# Altium PCB OUT_FET_PCB.PcbDoc
Units mil, origin at the board's own origin, x right, y up, seen from the top; angles counter-clockwise.
Board outline 3440 x 4740 mil, 2 copper layers (Top Layer, Bottom Layer); 90 components, 45 nets, 252 pads, 0 vias.
Unrouted connection lines stored in the file: 19.
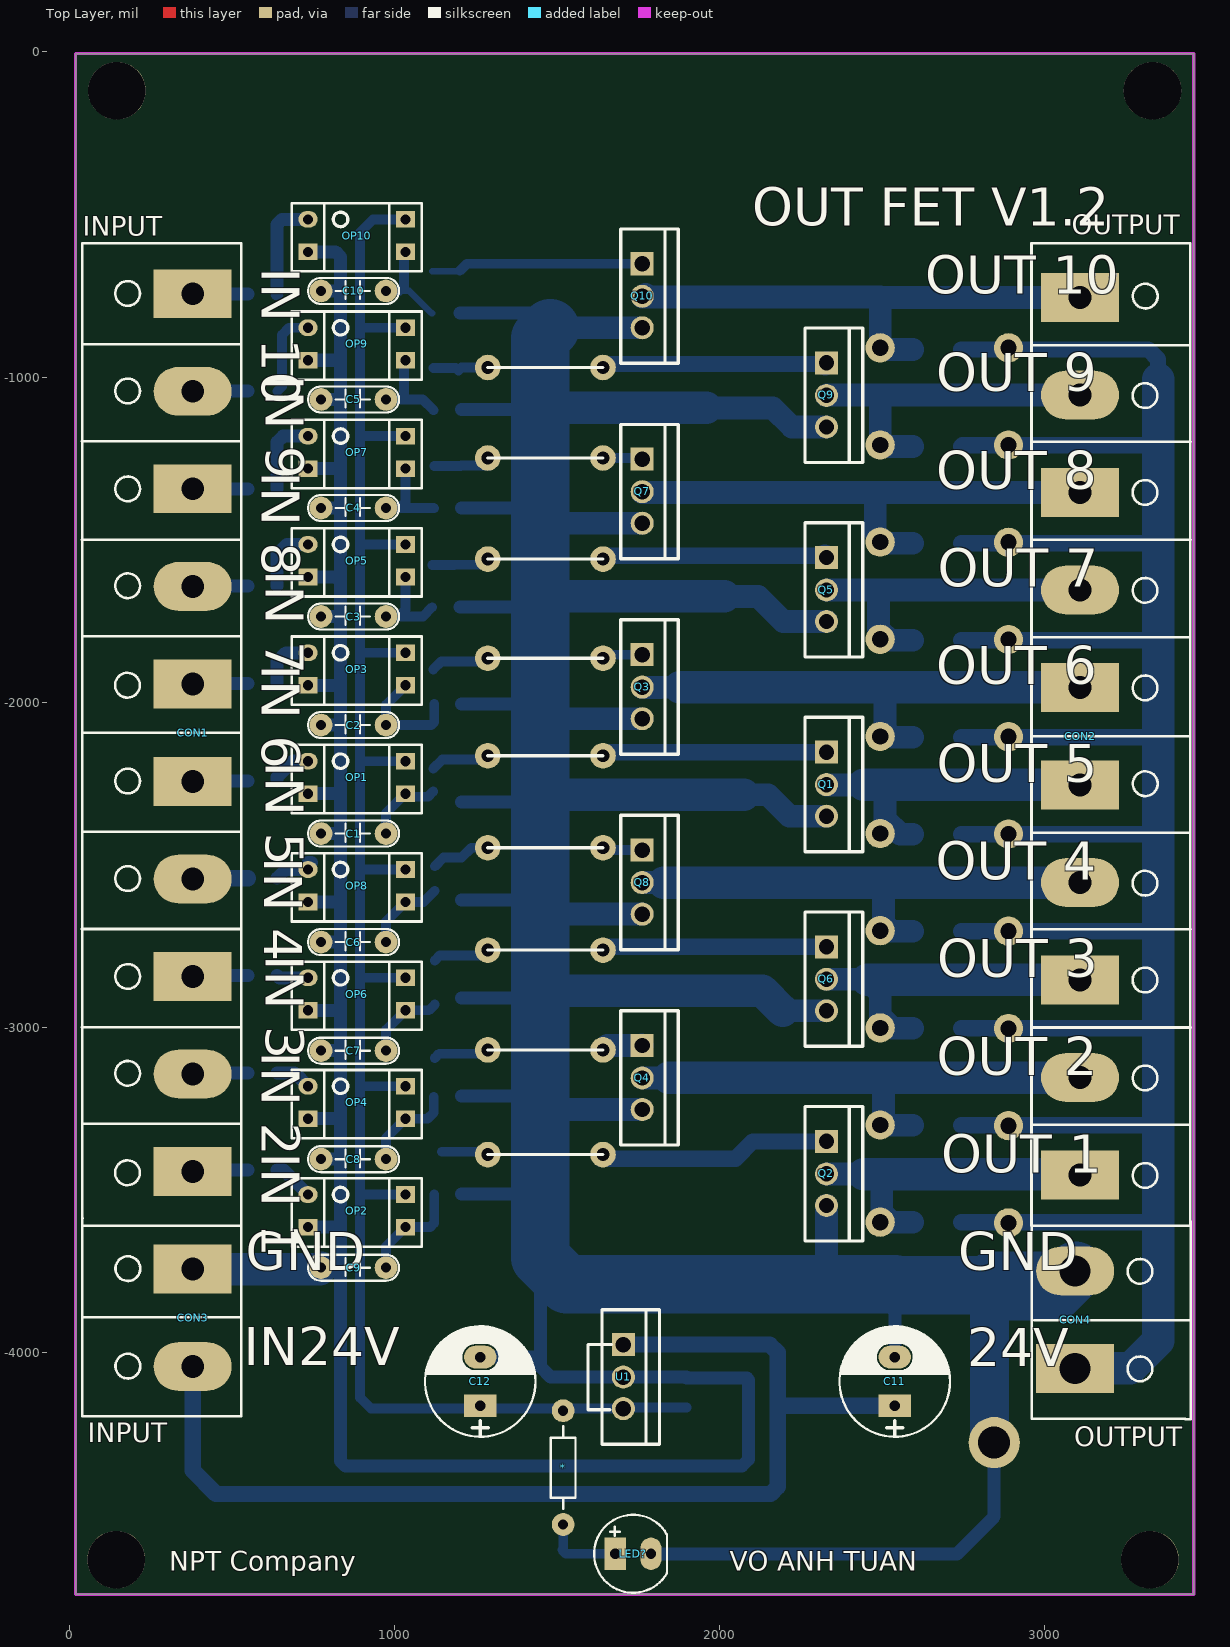
[diagram p0: Top Layer view]
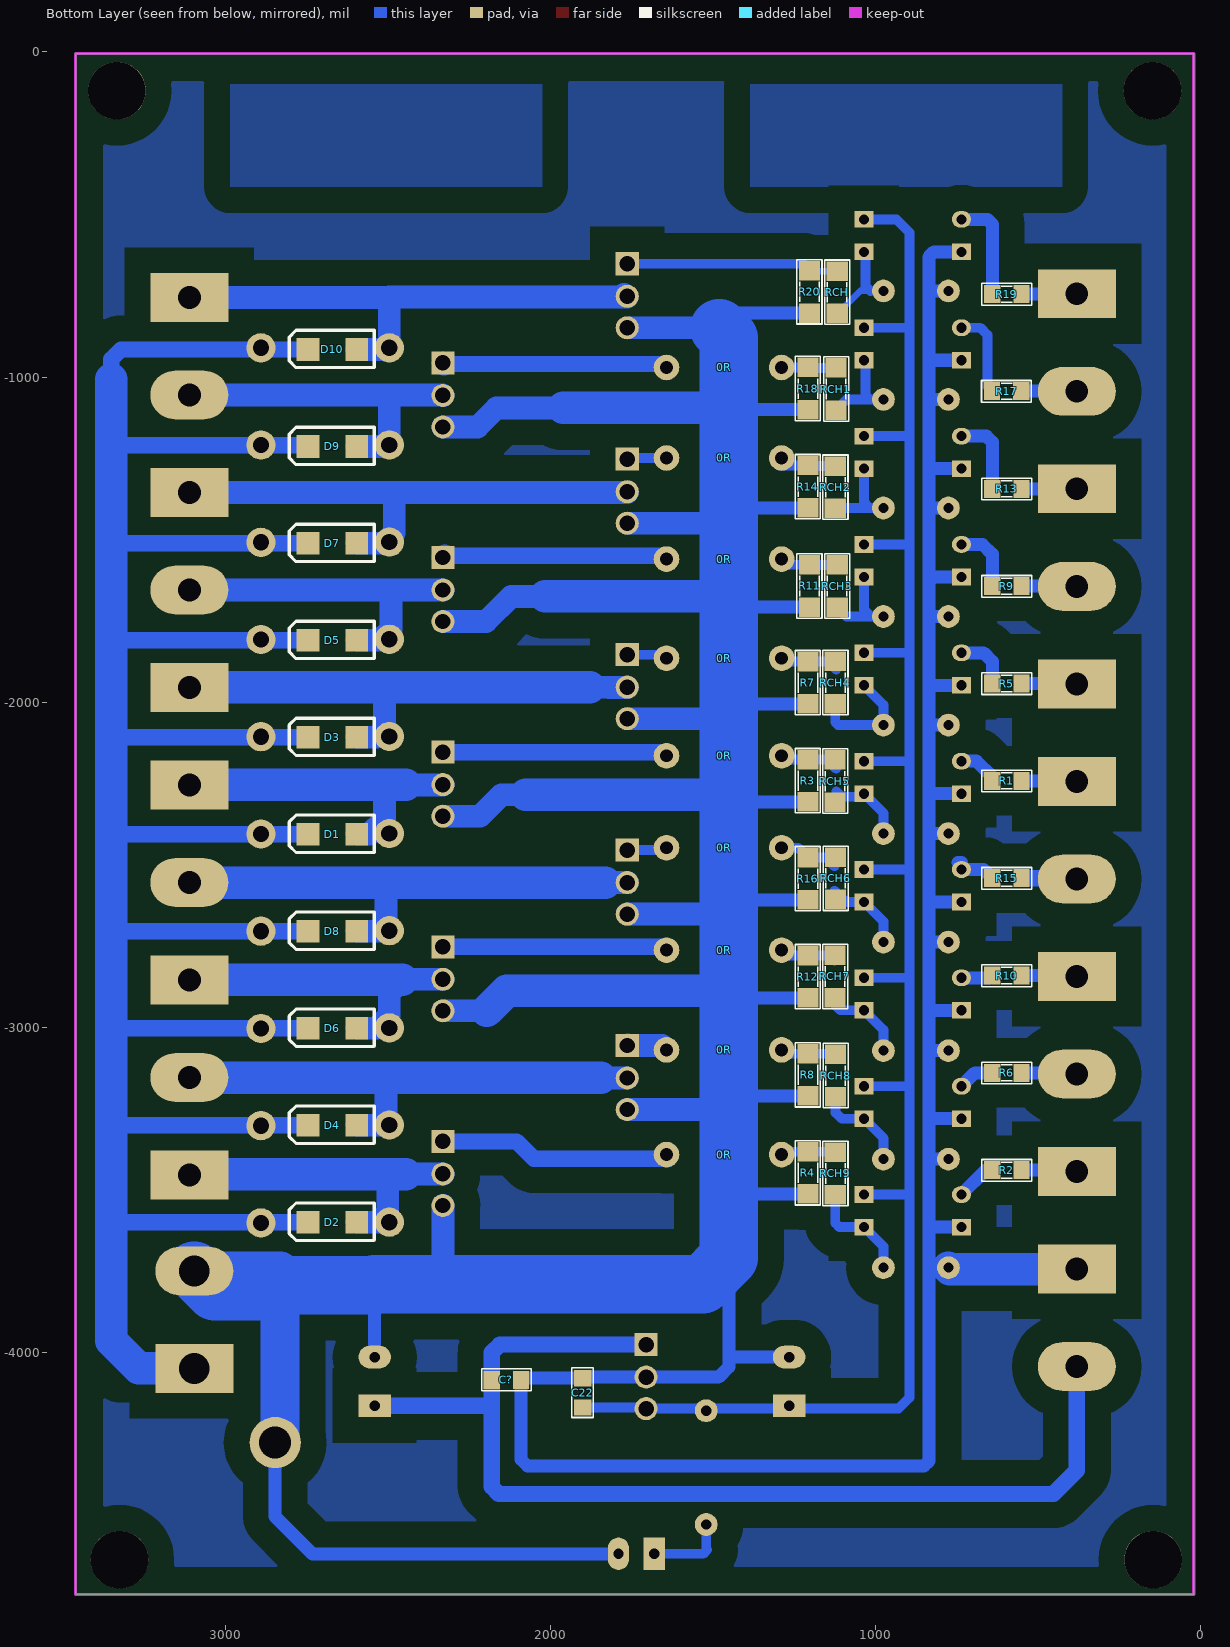
[diagram p1: Bottom Layer view, seen from below]
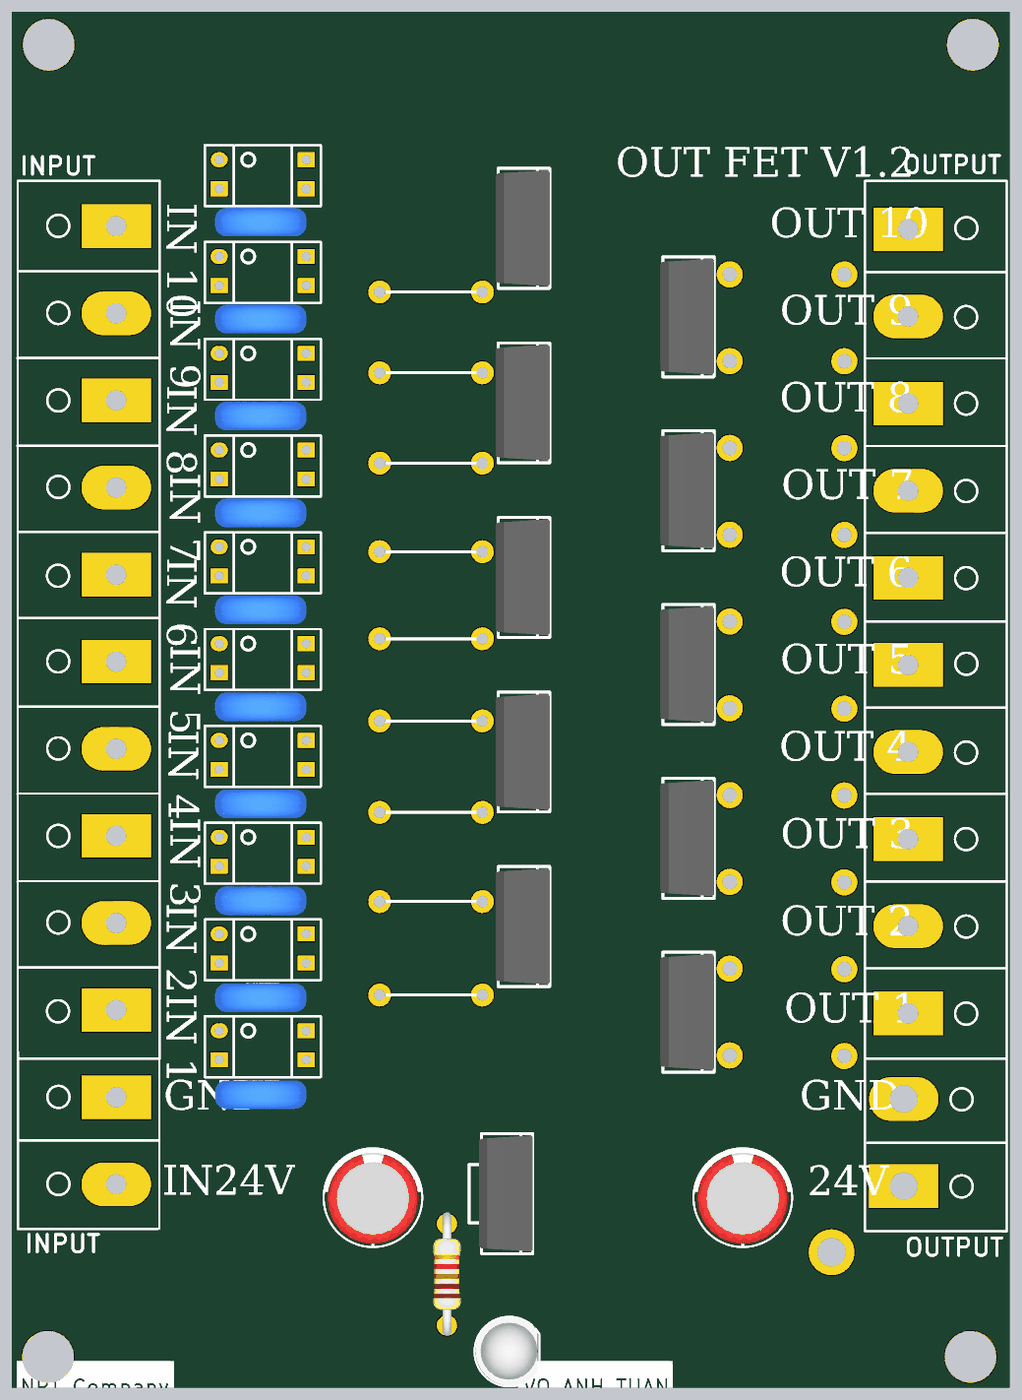
[diagram p2: 3D render of the assembled board from above, using the file's embedded part models]
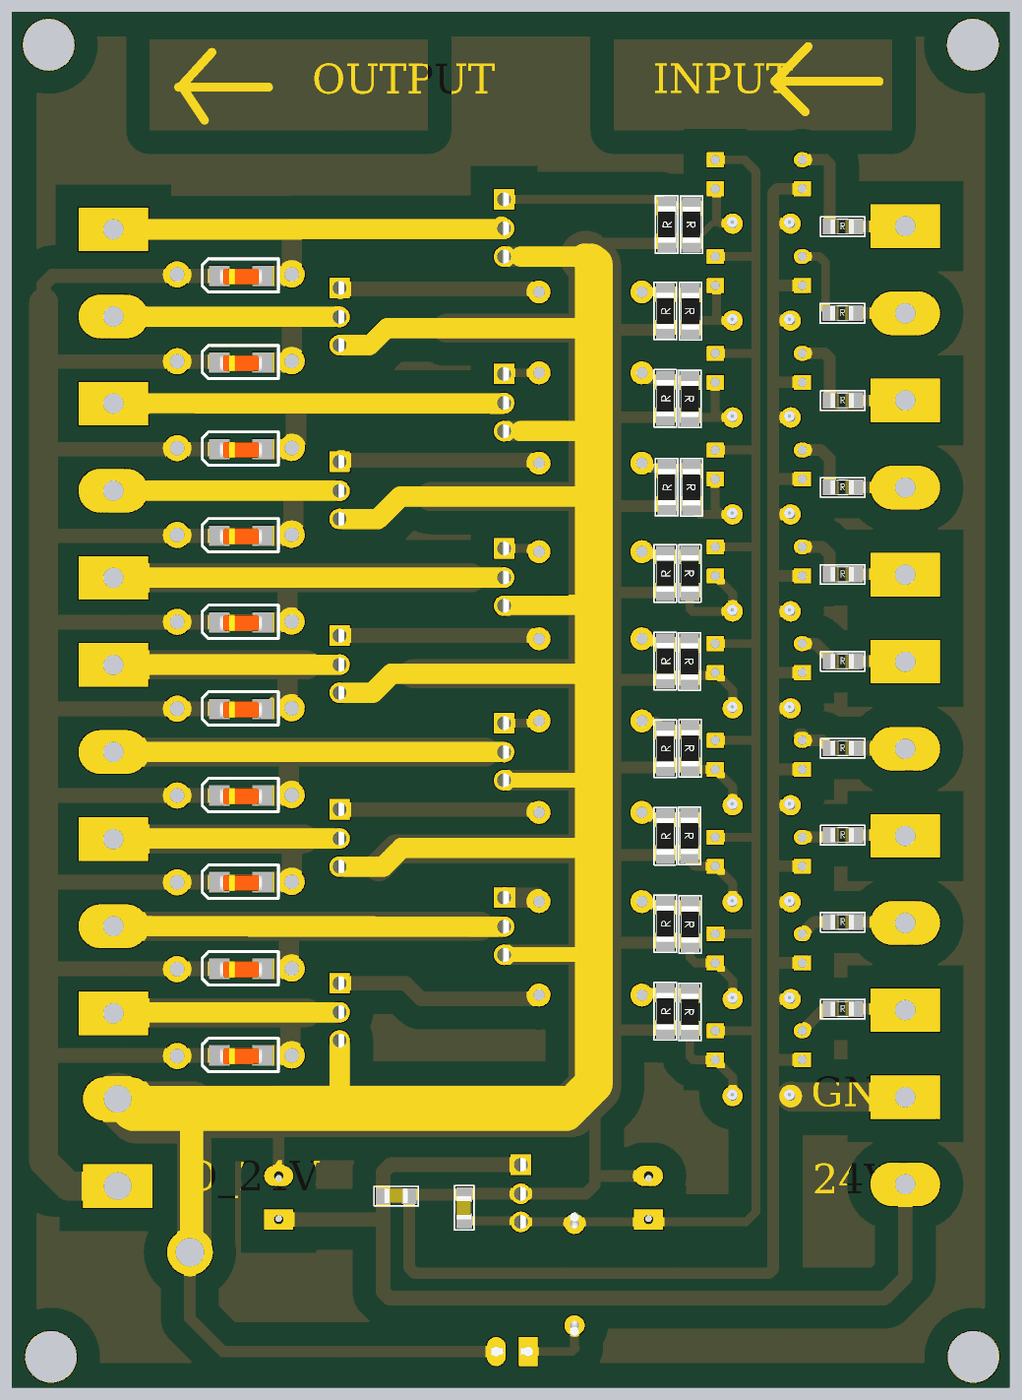
[diagram p3: 3D render of the assembled board from below, using the file's embedded part models]

## Layer stack, top to bottom
Top Solder: solder mask 0.4, Solder Resist, Dk 3.5
Top Layer: signal copper 1.4
Dielectric 1: dielectric 12.6, FR-4, Dk 4.8
Bottom Layer: signal copper 1.4
Bottom Solder: solder mask 0.4, Solder Resist, Dk 3.5

## Board outline
20,-4745 20,-5 3460,-5 3460,-4745

## Design rules (kind name [scope] priority, off if disabled: settings)
Clearance [All] p1: gap=10 ignorepadtopadclearanceinfootprint=FALSE except(0: Arc-Hole Track-Hole SMDPad-Hole THPad-Hole Via-Hole Fill-Hole Poly-Hole Region-Hole Text-Hole; 80: Arc-Poly Track-Poly SMDPad-Poly THPad-Poly Via-Poly Fill-Poly Poly-Poly)
PolygonConnect [All] p1: connectstyle=Relief reliefconductorwidth=10 reliefentries=4 polygonreliefangle="90 Angle" airgapwidth=10
RoomDefinition OUT_FET_SCH [InComponentClass('OUT_FET_SCH')] p1: confinementstyle=ConfineIn formatcopy=TRUE lockcomponents=FALSE outline -8591.47,-21464 -6591.47,-21464 -6591.47,-20464 -8591.47,-20464
RoutingVias [All] p1: holewidth=28 width=50 viastyle="Through Hole" minholewidth=28 minwidth=50 maxholewidth=28 maxwidth=50
SolderMaskExpansion [All] p1: expansion=4
Width [All] p1: maxlimit=200 minlimit=10 preferedwidth=50
30 further rules are at their usual default settings.

## Classes and differential pairs
component class OUT_FET_SCH: * C1 C2 C3 C4 C5 C6 C7 C8 C9 C10 C11 C12 C22 C? CON1 CON2 CON3 CON4 D1 D2 D3 D4 D5 D6 D7 D8 D9 D10 LED? OP1 OP2 OP3 OP4 OP5 OP6 OP7 OP8 OP9 OP10 Q1 Q2 Q3 Q4 Q5 Q6 Q7 Q8 Q9 Q10 R1 R2 R3 R4 R5 R6 R7 R8 R9 R10 R11 R12 R13 R14 R15 R16 R17 R18 R19 R20 U1

## Components (designator, comment, footprint, x,y, rotation, side; value= is the part's Value field where it differs from the comment)
0R "Comment" GIM 1288,-970.56 r0 bottom
0R "Comment" GIM 1288,-1249 r0 bottom
0R "Comment" GIM 1288,-1560 r0 bottom
0R "Comment" GIM 1288,-1865 r0 bottom
0R "Comment" GIM 1288,-2165 r0 bottom
0R "Comment" GIM 1288,-2448 r0 bottom
0R "Comment" GIM 1288,-2763 r0 bottom
0R "Comment" GIM 1288,-3070 r0 bottom
0R "Comment" GIM 1288,-3392 r0 bottom
* "1K" "TRO_VACH_ 1/4W" 1520,-4180 r270 top
C1 "104" TU_GOM(104-->105pF) 875,-2404.44 r0 top value=0.1uF
C2 "104" TU_GOM(104-->105pF) 875,-2070.56 r0 top value=0.1uF
C3 "104" TU_GOM(104-->105pF) 875,-1736.67 r0 top value=0.1uF
C4 "104" TU_GOM(104-->105pF) 875,-1402.78 r0 top value=0.1uF
C5 "104" TU_GOM(104-->105pF) 875,-1068.89 r0 top value=0.1uF
C6 "104" TU_GOM(104-->105pF) 875,-2738.33 r0 top value=0.1uF
C7 "104" TU_GOM(104-->105pF) 875,-3072.22 r0 top value=0.1uF
C8 "104" TU_GOM(104-->105pF) 875,-3406.11 r0 top value=0.1uF
C9 "104" TU_GOM(104-->105pF) 875,-3740 r0 top value=0.1uF
C10 "104" TU_GOM(104-->105pF) 875,-735 r0 top value=0.1uF
C11 "100uF/16V" "TU_HOA(100uF/35V - 470uF/16V)" 2540,-4090 r90 top value=100uF/35V/50V
C12 "100uF/16V" "TU_HOA(100uF/35V - 470uF/16V)" 1265,-4090 r90 top value=100uF/35V/50V
C22 "104" TU_SMD_0805 1900,-4125 r270 bottom
C? "104" TU_SMD_0805 2135,-4085 r0 bottom
CON1 "CON 10 KF762_MH" "CON 10 KF762" 380,-2094 r270 top
CON2 "CON 10 KF762_MH" "CON 10 KF762" 3110,-2105 r90 top
CON3 "CON 2 KF762_MH" "Con 2 KF762"#1 380,-3894 r270 top
CON4 "CON 2 KF762_MH" "Con 2 KF762"#2 3095,-3900 r90 top
D1 "Diode TVS P6KE30A 30V SMBJ30A" SOD80 2670,-2406.67 r180 bottom
D2 "Diode TVS P6KE30A 30V SMBJ30A" SOD80 2670,-3600 r180 bottom
D3 "Diode TVS P6KE30A 30V SMBJ30A" SOD80 2670,-2108.33 r180 bottom
D4 "Diode TVS P6KE30A 30V SMBJ30A" SOD80 2670,-3301.67 r180 bottom
D5 "Diode TVS P6KE30A 30V SMBJ30A" SOD80 2670,-1810 r180 bottom
D6 "Diode TVS P6KE30A 30V SMBJ30A" SOD80 2670,-3003.33 r180 bottom
D7 "Diode TVS P6KE30A 30V SMBJ30A" SOD80 2670,-1511.67 r180 bottom
D8 "Diode TVS P6KE30A 30V SMBJ30A" SOD80 2670,-2705 r180 bottom
D9 "Diode TVS P6KE30A 30V SMBJ30A" SOD80 2670,-1213.33 r180 bottom
D10 "Diode TVS P6KE30A 30V SMBJ30A" SOD80 2670,-915 r180 bottom
LED? "LED5" "LED 5mm DO" 1735,-4620 r0 top
OP1 "PC817" DIP4 735,-2181.67 r270 top
OP2 "PC817" DIP4 735,-3515 r270 top
OP3 "PC817" DIP4 735,-1848.33 r270 top
OP4 "PC817" DIP4 735,-3181.67 r270 top
OP5 "PC817" DIP4 735,-1515 r270 top
OP6 "PC817" DIP4 735,-2848.33 r270 top
OP7 "PC817" DIP4 735,-1181.67 r270 top
OP8 "PC817" DIP4 735,-2515 r270 top
OP9 "PC817" DIP4 735,-848.33 r270 top
OP10 "PC817" DIP4 735,-515 r270 top
Q1 "FDD 8870" TO220F 2330,-2252.5 r270 top
Q2 "FDD 8870" TO220F 2330,-3450 r270 top
Q3 "FDD 8870" TO220F 1763,-1952.5 r270 top
Q4 "FDD 8870" TO220F 1763,-3155 r270 top
Q5 "FDD 8870" TO220F 2330,-1653.75 r270 top
Q6 "FDD 8870" TO220F 2330,-2851.25 r270 top
Q7 "FDD 8870" TO220F 1763,-1351.25 r270 top
Q8 "FDD 8870" TO220F 1763,-2553.75 r270 top
Q9 "FDD 8870" TO220F 2330,-1055 r270 top
Q10 "FDD 8870" TO220F 1763,-750 r270 top
R1 "2K2" "Tro SMD 0805" 595,-2242.22 r180 bottom
R2 "2K2" "Tro SMD 0805" 595,-3440 r180 bottom
R3 "10K" TRO_SMD_1206 1210,-2243.78 r90 bottom
R4 "10K" TRO_SMD_1206 1210,-3450 r90 bottom
R5 "2K2" "Tro SMD 0805" 595,-1942.78 r180 bottom
R6 "2K2" "Tro SMD 0805" 595,-3140.56 r180 bottom
R7 "10K" TRO_SMD_1206 1210,-1942.22 r90 bottom
R8 "10K" TRO_SMD_1206 1210,-3148.44 r90 bottom
R9 "2K2" "Tro SMD 0805" 595,-1643.33 r180 bottom
R10 "2K2" "Tro SMD 0805" 595,-2841.11 r180 bottom
R11 "10K" TRO_SMD_1206 1205,-1644.67 r90 bottom
R12 "10K" TRO_SMD_1206 1210,-2846.89 r90 bottom
R13 "2K2" "Tro SMD 0805" 595,-1343.89 r180 bottom
R14 "10K" TRO_SMD_1206 1210,-1339.11 r90 bottom
R15 "2K2" "Tro SMD 0805" 595,-2541.67 r180 bottom
R16 "10K" TRO_SMD_1206 1210,-2545.33 r90 bottom
R17 "2K2" "Tro SMD 0805" 596,-1043.44 r180 bottom
R18 "10K" TRO_SMD_1206 1210,-1037.56 r90 bottom
R19 "2K2" "Tro SMD 0805" 595,-745 r180 bottom
R20 "10K" TRO_SMD_1206 1205,-740 r90 bottom
RCH "Comment" TRO_SMD_1206 1114,-737 r270 bottom
RCH1 "Comment" TRO_SMD_1206 1118,-1035 r270 bottom
RCH2 "Comment" TRO_SMD_1206 1120,-1337 r270 bottom
RCH3 "Comment" TRO_SMD_1206 1114,-1641 r270 bottom
RCH4 "Comment" TRO_SMD_1206 1120,-1938 r270 bottom
RCH5 "Comment" TRO_SMD_1206 1121,-2241 r270 bottom
RCH6 "Comment" TRO_SMD_1206 1119,-2540 r270 bottom
RCH7 "Comment" TRO_SMD_1206 1121,-2842 r270 bottom
RCH8 "Comment" TRO_SMD_1206 1119,-3147 r270 bottom
RCH9 "Comment" TRO_SMD_1206 1120,-3448 r270 bottom
U1 "78M12 TO252_MH" TO220F 1705,-4075 r270 top

## Footprints (in the part's own frame and the unit in brackets; to place one, negate y for a bottom-side part, rotate by r counter-clockwise, add the part's x,y. Pads: shape width x height; smd on the part's side, far side on the other; paste and mask are expansions set on the pad)
"Con 2 KF762"#1 [mil]
  rect 150x240 hole 70: 1(-150,0)
  oval 150x240 hole 70: 2(150,0)
  silkscreen extent -306,-339 304,149
"Con 2 KF762"#2 [mil]
  rect 150x240 hole 95: 1(-150,0)
  oval 150x240 hole 95: 2(150,0)
  silkscreen extent -306,-355 303,134
"CON 10 KF762" [mil]
  rect 150x240 hole 70: 1(-1350,0) 3(-750,0) 5(-150,0) 6(150,0) 8(750,0) 10(1350,0)
  oval 150x240 hole 70: 2(-1050,0) 4(-450,0) 7(450,0) 9(1050,0)
  silkscreen extent -1506,-341 1517,149
DIP4 [mm] "W.300/L.400"
  oval 1.3x1.5 hole 0.8: 1(0,0)
  rect 1.3x1.5 hole 0.8: 2(2.54,0) 3(2.54,7.62) 4(0,7.62)
  silkscreen extent -1.27,-1.27 4.06,8.89, body extent -1.27,-1.27 4.06,8.89, height 5
GIM [mm]
  round 2 hole 1: 1(0,0) 1(9,0)
"LED 5mm DO" [mil] "LED 2 PIN, 5 ly , Only colour, pin to pin 110mil"
  rect 65x100 hole 32: 1(-55,0)
  oval 65x100 hole 32: 2(55,0)
  silkscreen extent -120,-120 104,120, body extent -116,-117 98,120, height 339
SOD80 [mil]
  rect 70x70 smd: 1(74.8,0) 2(-74.8,0)
  silkscreen extent -133,-56 129,59, body extent -73,-34 73,29, height 63
TO220F [mm]
  rect 1.8x1.8 hole 1.2: 1(-2.502,0)
  round 1.8 hole 1.2: 2(0.038,0) 3(2.502,0)
  silkscreen extent -5.22,-1.68 5.28,2.82, body extent -5.06,-1.88 5.08,2.82, height 19.37
"Tro SMD 0805" [mil]
  rect 50x55 smd: 1(-45,0) 2(45,0)
  silkscreen extent -77,-34 76,33, body extent -62,-28 56,27, height 21
TRO_SMD_1206 [mil]
  rect 60x65 smd: 1(-63,-3) 2(67,-3)
  silkscreen extent -97,-41 101,36, body extent -81,-38 85,33, height 25
"TRO_VACH_ 1/4W" [mil] "R 1/4W, 2 Pin, 350mil"
  round 70 hole 31: 1(0,0) 2(350,0)
  silkscreen extent 48,-38 302,38, body extent -40,-47 386,47, height 111
TU_GOM(104-->105pF) [mil]
  round 70 hole 31: 1(-100,0) 2(100,0)
  silkscreen extent -140,-40 140,40, body extent -154,-44 160,55, height 407
"TU_HOA(100uF/35V - 470uF/16V)" [mil]
  rect 70x100 hole 32: 1(-75,0)
  oval 70x100 hole 32: 2(75,0)
  silkscreen extent -170,-170 170,170, body extent -160,-157 155,157, height 446
TU_SMD_0805 [mil]
  rect 50x55 smd: 1(-45,0) 2(45,0)
  silkscreen extent -77,-34 76,33, body extent -40,-27 40,23, height 24

## Part data
*: library part TRO_VACH_1/4W_MH
C1 C2 C3 C4 C5 C6 C7 C8 C9 C10: library part "TU_GOM(104 => 105pF)_MH"
C11 C12: library part TU_HOA_100uF_50V_MH, "TU_HOA_100uF_50V", Description 1="1000uF/6,3V - 470uF/16V - 330uF - 25V", Description 2="220uF/35V - 100uF/50V - 63V - 4,7uF/200V", Description 3="22uF => 33uF100V - 3,3uF => 4,7uF/250V", Description 4="2,2uF =>3,3uF/350 - 2,2uF/400V - 1uF/450V"
C22 C?: library part TU_SMD_0805_MH
CON1 CON2: "CON 10 KF762 - 10P 7.62mm"
CON3 CON4: "CON 2 KF762 - 2P 7.62mm"
D1 D2 D3 D4 D5 D6 D7 D8 D9 D10: library part "Diode 1N4148 SOD80 450mA 100V ( LL34 1N4148 SMD)_MH", "Diode 1N4148 SOD80 450mA 100V ( LL34 1N4148 SMD)"
LED?: library part "LED 5mm_MH", "LED 5mm"
OP1 OP2 OP3 OP4 OP5 OP6 OP7 OP8 OP9 OP10: library part "PC817/EL817 5V 5mA SMD_MH", "PC817/EL817 5V 5mA SMD_MH"
R1 R2 R3 R4 R5 R6 R7 R8 R9 R10 R11 R12 R13 R14 R15 R16 R17 R18 R19 R20: library part TRO_SMD_1206_MH

## Free pads (board coordinates)
  round 177.17 hole 177.17: 22(147,-119) 23(3333,-119) 24(3325,-4638) 25(145,-4638)
  round 157.48 hole 98.43: 29(2846,-4278)
  round 90 hole 50: 30(2495,-910) 31(2495,-1208.89) 32(2495,-1507.78) 33(2495,-1806.67) 34(2495,-2105.56) 35(2495,-2404.44) 36(2495,-2703.33) 37(2495,-3002.22) 38(2495,-3301.11) 39(2495,-3600) 40(2890,-3602.11) 41(2890,-3303) 42(2890,-3003.89) 43(2890,-2704.78) 44(2890,-2405.67) 45(2890,-2106.56) 46(2890,-1807.44) 47(2890,-1508.33) 48(2890,-1209.22) 49(2890,-910.11)

## Nets (pads, with @x,y where several pads share a name; then routed paths per layer and width w, separated by ;. In a path a pad name is that pad's centre, name@x,y a point inside that pad or via, vN(x,y) a via of type N, cw(c..) or ccw(c..) an arc to the next point about the centre after c; other vN are vias at no path point)
12V: *.1 C12.1 C22.2 OP1.4 OP2.4 OP3.4 OP4.4 OP5.4 OP6.4 OP7.4 OP8.4 OP9.4 OP10.4 U1.3 | length 6041.9
  Bottom Layer w30: OP2.4 900,-3515 895,-3510 ; OP4.4 896.67,-3181.67 895,-3180 ; OP6.4 898.33,-2848.33 895,-2845 ; OP8.4 905,-2515 895,-2525 ; OP1.4 898.33,-2181.67 895,-2185 ; OP3.4 901.67,-1848.33 895,-1855 ; OP5.4 900,-1515 895,-1510 ; OP7.4 901.67,-1181.67 895,-1175 ; OP9.4 901.67,-848.33 895,-855 ; OP10.4 935,-515 895,-555 895,-855 ; C22.2 1708.5,-4170 U1.3 928.5,-4173.5 895,-4140 895,-3510 ; 895,-3510 895,-3180 ; 895,-3180 895,-2845 ; 895,-2845 895,-2525 ; 895,-2525 895,-2185 ; 895,-2185 895,-1855 ; 895,-1855 895,-1510 ; 895,-1510 895,-1175 ; 895,-1175 895,-855
24V: C11.1 C?.2 CON3.2 U1.1 | length 3419.6
  Bottom Layer w50: CON3.2 380,-4364 452,-4436 2158,-4436 2180,-4414 2180,-4159 ; U1.1 2155.5,-3976.5 2180,-4001 C?.2 2180,-4159 ; C11.1 2186,-4165 2180,-4159
GND: C1.1 C2.1 C3.1 C4.1 C5.1 C6.1 C7.1 C8.1 C9.1 C10.1 C11.2 C12.2 C22.1 C?.1 CON3.1 CON4.2 LED?.2 OP1.2 OP2.2 OP3.2 OP4.2 OP5.2 OP6.2 OP7.2 OP8.2 OP9.2 OP10.2 pad.29 Q1.3 Q2.3 Q3.3 Q4.3 Q5.3 Q6.3 Q7.3 Q8.3 Q9.3 Q10.3 R3.1 R4.1 R7.1 R8.1 R11.1 R12.1 R14.1 R16.1 R18.1 R20.1 U1.2 | length 23242
  Bottom Layer w40: OP2.2 830,-3615 835,-3610 ; OP4.2 831.67,-3281.67 835,-3285 ; OP6.2 833.33,-2948.33 835,-2950 ; OP8.2 825,-2615 835,-2625 ; OP1.2 831.67,-2281.67 835,-2285 ; OP3.2 833.33,-1948.33 835,-1950 ; OP5.2 820,-1615 835,-1630 ; OP7.2 826.67,-1281.67 835,-1290 ; OP9.2 831.67,-948.33 835,-945 ; OP10.2 820,-615 835,-630 835,-740 ; C9.1 835,-3740 ; C8.1 833.89,-3406.11 835,-3405 ; C7.1 832.22,-3072.22 835,-3075 ; C6.1 833.33,-2738.33 835,-2740 ; C1.1 834.44,-2404.44 835,-2405 ; C2.1 834.44,-2070.56 835,-2070 ; C3.1 826.67,-1736.67 835,-1745 ; C4.1 832.78,-1402.78 835,-1405 ; C5.1 833.89,-1068.89 835,-1070 ; C10.1 830,-735 835,-740 ; R11.1 1402.33,-1707.67 ; R20.1 1436,-803 1481.5,-848.5 ; R4.1 1447,-3513 1450,-3510 ; R8.1 1406.44,-3211.44 1450,-3255 ; R12.1 1405.11,-2909.89 1450,-2865 ; R16.1 1408.33,-2608.33 1450,-2650 ; R3.1 1428.22,-2306.78 1450,-2285 ; R7.1 1390.22,-2005.22 1450,-2065 ; R14.1 1392.11,-1402.11 1450,-1460 ; R18.1 1444.44,-1100.56 1450,-1095 ; C12.2 1450,-4015 ; 1450,-3710 1450,-4015 ; LED?.2 2732,-4620 2846,-4506 pad.29 ; C22.1 2085,-4080 C?.1 2090,-4330 2070,-4350 850,-4350 835,-4335 835,-3740 ; C22.1@1900,-4076.5 U1.2 1481.5,-4076.5 1450,-4045 1450,-4015 ; C11.2 2540,-3794 2540,-3791 ; 835,-3740 835,-3610 ; 835,-3610 835,-3405 ; 835,-3405 835,-3285 ; 835,-3285 835,-3075 ; 835,-3075 835,-2950 ; 835,-2950 835,-2740 ; 835,-2740 835,-2625 ; 835,-2625 835,-2405 ; 835,-2405 835,-2285 ; 835,-2285 835,-2070 ; 835,-2070 835,-1950 ; 835,-1950 835,-1745 ; 835,-1745 835,-1630 ; 835,-1630 835,-1405 ; 835,-1405 835,-1290 ; 835,-1290 835,-1070 ; 835,-1070 835,-945 ; 835,-945 835,-740
  Bottom Layer w70: 1450,-3255 1451.5,-3253.5 Q4.3 ; 1450,-2650 1452.25,-2652.25 Q8.3 ; 1450,-2065 1464,-2051 Q3.3 ; 1450,-1460 1460.25,-1449.75 Q7.3 ; 1480,-850 1481.5,-848.5 Q10.3@1754,-848.5 ; 1960,-1095 2165,-1095 2223.5,-1153.5 Q9.3 ; 2015,-1675 2120,-1675 2197.25,-1752.25 Q5.3 ; 2075,-2285 2150,-2285 2216,-2351 Q1.3 ; 2195,-2950 2195.25,-2949.75 Q6.3 ; 2325,-3750 2330,-3745 Q2.3
  Bottom Layer w100: CON3.1 771,-3744 C9.1 ; 1450,-2888 2133,-2888 2195,-2950 ; 1450,-2285 2075,-2285 ; 1450,-1675 2015,-1675 ; 1450,-1095 1960,-1095
  Bottom Layer w120: 2831,-3794 2831,-3813 2831,-4253 pad.29 ; 2831,-3750 CON4.2
  Bottom Layer w180: 1480,-850 1450,-880 1450,-1095 1450,-1460 1450,-1675 1450,-2065 1450,-2285 1450,-2650 1450,-2865 1450,-2888 1450,-3255 1450,-3510 1450,-3710 1531,-3791 2540,-3791 ; 2540,-3794 2831,-3794 ; 2831,-3813 3032,-3813 CON4.2
IN1: CON1.10 R2.2 | length 171.7
  Bottom Layer w40: CON1.10 384,-3440 R2.2
IN2: CON1.9 R6.2 | length 171.4
  Bottom Layer w40: CON1.9 383.44,-3140.56 R6.2
IN3: CON1.8 R10.2 | length 171.2
  Bottom Layer w40: CON1.8 382.89,-2841.11 R10.2
IN4: CON1.7 R15.2 | length 171
  Bottom Layer w50: CON1.7 382.33,-2541.67 R15.2
IN5: CON1.6 R1.2 | length 170.7
  Bottom Layer w40: CON1.6 381.78,-2242.22 R1.2
IN6: CON1.5 R5.2 | length 170.5
  Bottom Layer w40: CON1.5 381.22,-1942.78 R5.2
IN7: CON1.4 R9.2 | length 170.3
  Bottom Layer w40: CON1.4 380.67,-1643.33 R9.2
IN8: CON1.3 R13.2 | length 170
  Bottom Layer w40: CON1.3 380.11,-1343.89 R13.2
IN9: CON1.2 R17.2 | length 171.2
  Bottom Layer w40: CON1.2 380.56,-1043.44 R17.2
IN10: CON1.1 R19.2 | length 170.4
  Bottom Layer w40: CON1.1 381,-745 R19.2
Net*_2: *.2 LED?.1 | length 261.4
  Bottom Layer w30: *.2@1530,-4520 *.2 1520,-4605 1517,-4608 1529,-4620 LED?.1
NetC1_2: 0R.1@1288,-2165 0R.1@1642.33,-2165 C1.2 OP1.3 Q1.1 R3.2 RCH5.1 RCH5.2 | length 1111.9
  Bottom Layer w30: C1.2 975,-2341.67 OP1.3 ; OP1.3@1045,-2291.11 1103.89,-2291.11 1120,-2275 ; RCH5.1@1120,-2205 1148.22,-2176.78 R3.2 0R.1@1303.22,-2176.78
  Bottom Layer w50: 0R.1@1642.33,-2154 Q1.1
NetC2_2: 0R.1@1288,-1865 0R.1@1642.33,-1865 C2.2 OP3.3 Q3.1 R7.2 RCH4.1 RCH4.2 | length 655.3
  Bottom Layer w30: OP3.3 975,-2008.33 C2.2 1114.44,-2070.56 1123,-2062 RCH4.2 ; RCH4.1@1120,-1900 1144.78,-1875.22 R7.2 0R.1@1299.78,-1875.22 ; 0R.1@1653.33,-1854 Q3.1
NetC3_2: 0R.1@1288,-1560 0R.1@1642.33,-1560 C3.2 OP5.3 Q5.1 R11.2 RCH3.1 RCH3.2 | length 1149.8
  Bottom Layer w30: C3.2 1013.33,-1736.67 ; OP5.3 1035,-1715 1013.33,-1736.67 ; RCH3.2 1088.33,-1736.67 1013.33,-1736.67 ; RCH3.1 1184.67,-1578 1185,-1577.67 R11.2 0R.1@1292.33,-1577.67
  Bottom Layer w50: 0R.1@1642.33,-1550 Q5.1@2324.75,-1550
  Bottom Layer w70: Q5.1@2324.75,-1550 Q5.1
NetC4_2: 0R.1@1288,-1249 0R.1@1642.33,-1249 C4.2 OP7.3 Q7.1 R14.2 RCH2.1 RCH2.2 | length 564.6
  Bottom Layer w30: C4.2 1017.22,-1402.78 ; OP7.3 1035,-1385 1017.22,-1402.78 ; RCH2.2 1121.78,-1402.78 1017.22,-1402.78 ; RCH2.1 1205.11,-1274 R14.2 0R.1@1292.89,-1272.11 ; 0R.1@1642.33,-1249 Q7.1@1759.25,-1249
NetC5_2: 0R.1@1288,-970.56 0R.1@1642.33,-970.56 C5.2 OP9.3 Q9.1 R18.2 RCH1.1 RCH1.2 | length 1152.9
  Bottom Layer w30: C5.2 1016.11,-1068.89 ; OP9.3 1030,-953.33 1030,-1055 1016.11,-1068.89 ; RCH1.2 1087.89,-1068.89 1016.11,-1068.89 ; RCH1.1 1189.56,-972 1197.56,-980 R18.2 1288,-970.56 0R.1@1289.44,-970.56
  Bottom Layer w50: 0R.1@1642.33,-960 Q9.1@2326.5,-960
  Bottom Layer w70: Q9.1@2326.5,-960 Q9.1
NetC6_2: 0R.1@1288,-2448 0R.1@1642.33,-2448 C6.2 OP8.3 Q8.1 R16.2 RCH6.1 RCH6.2 | length 552.7
  Bottom Layer w30: C6.2 975,-2675 OP8.3 1090,-2615 RCH6.2@1125,-2580 ; RCH6.1@1125,-2505 1151.67,-2478.33 R16.2 1237.33,-2448 0R.1@1288,-2448 ; 0R.1@1649.58,-2455.25 Q8.1
NetC7_2: 0R.1@1288,-2763 0R.1@1642.33,-2763 C7.2 OP6.3 Q6.1 R12.2 RCH7.1 RCH7.2 | length 1115.2
  Bottom Layer w30: C7.2 975,-3008.33 OP6.3 1106.67,-2948.33 RCH7.2@1125,-2930 ; RCH7.1@1125,-2795 1140.11,-2779.89 R12.2 0R.1@1299.89,-2779.89
  Bottom Layer w50: 0R.1@1642.33,-2752.75 Q6.1
NetC8_2: 0R.1@1288,-3070 0R.1@1642.33,-3070 C8.2 OP4.3 Q4.1 R8.2 RCH8.1 RCH8.2 | length 579.4
  Bottom Layer w30: C8.2 975,-3341.67 OP4.3 1103.33,-3281.67 1122,-3263 RCH8.2 ; RCH8.1@1125,-3095 1138.56,-3081.44 R8.2 0R.1@1296.44,-3081.44
  Bottom Layer w70: 0R.1@1655.83,-3056.5 Q4.1 Q4.1@1761.5,-3055
NetC9_2: 0R.1@1288,-3392 0R.1@1642.33,-3392 C9.2 OP2.3 Q2.1 R4.2 RCH9.1 RCH9.2 | length 1193
  Bottom Layer w30: C9.2 975,-3675 OP2.3 1111,-3615 1123,-3603 RCH9.2 ; RCH9.1@1147,-3383 R4.2 0R.1@1293,-3383
  Bottom Layer w50: 0R.1@1636,-3405 2050,-3405 2103.5,-3351.5 Q2.1
NetC10_2: C10.2 OP10.3 Q10.1 R20.2 RCH.1 RCH.2 | length 954.2
  Bottom Layer w20: C10.2 1015,-735 1046,-735 1115,-804 RCH.2 ; RCH.1 1201,-674 R20.2
  Bottom Layer w30: 1015,-735 1030,-720 1030,-620 OP10.3 ; R20.2 1223.5,-651.5 Q10.1
NetOP1_1: OP1.1 R1.1 | length 127.2
  Bottom Layer w40: R1.1 640,-2230 688.33,-2181.67 OP1.1
NetOP2_1: OP2.1 R2.1 | length 126.1
  Bottom Layer w40: R2.1 660,-3440 OP2.1
NetOP3_1: OP3.1 R5.1 | length 173.8
  Bottom Layer w40: R5.1 640,-1875 666.67,-1848.33 OP3.1
NetOP4_1: OP4.1 R6.1 | length 112
  Bottom Layer w40: R6.1 693.89,-3140.56 OP4.1
NetOP5_1: OP5.1 R9.1 | length 205.8
  Bottom Layer w40: R9.1 640,-1545 670,-1515 OP5.1
NetOP6_1: OP6.1 R10.1 | length 98
  Bottom Layer w40: R10.1 647.22,-2848.33 OP6.1
NetOP7_1: OP7.1 R13.1 | length 246.5
  Bottom Layer w40: R13.1 640,-1200 658.33,-1181.67 OP7.1
NetOP8_1: OP8.1 R15.1 | length 116
  Bottom Layer w40: R15.1 666.67,-2515 OP8.1 ; OP8.1@735,-2493.33 OP8.1@745,-2493.33
NetOP9_1: OP9.1 R17.1 | length 268.2
  Bottom Layer w30: R17.1 655,-1029.44 655,-870 676.67,-848.33 OP9.1
NetOP10_1: OP10.1 R19.1 | length 316.2
  Bottom Layer w40: R19.1 640,-530 655,-515 OP10.1
OUT1: CON2.1 D2.1 pad.39 Q2.2 | length 1007.1
  Bottom Layer w70: Q2.2 2443.43,-3451.5 2445,-3453.07 ; 2500,-3453.07 2500,-3570 2530,-3600 D2.1
  Bottom Layer w100: 2445,-3453.07 2500,-3453.07 3110,-3453.07 CON2.1
OUT2: CON2.2 D4.1 pad.38 Q4.2 | length 1629.8
  Bottom Layer w70: Q4.2 1901.5,-3156.5 1903,-3155 ; 2505,-3155 2505,-3280 2526.67,-3301.67 D4.1
  Bottom Layer w100: 1845,-3155 2505,-3155 CON2.2
OUT3: CON2.3 D6.1 pad.37 Q6.2 | length 1024.7
  Bottom Layer w70: Q6.2 2453.43,-2852.75 2455,-2854.32 2495,-2894.32 2495,-2965 2533.33,-3003.33 D6.1
  Bottom Layer w100: 2455,-2854.32 3110,-2854.32 CON2.3
OUT4: CON2.4 D8.1 pad.36 Q8.2 | length 1630.7
  Bottom Layer w70: Q8.2 1887.75,-2555.25 1888,-2555 ; 2505,-2555 2505,-2680 2530,-2705 D8.1
  Bottom Layer w100: 1830,-2555 2505,-2555 CON2.4
OUT5: CON2.5 D1.1 pad.35 Q1.2 | length 989.9
  Bottom Layer w70: Q1.2 2331,-2255 2445,-2255 ; 2510,-2255 2510,-2360 2556.67,-2406.67 D1.1
  Bottom Layer w100: 2445,-2255 2510,-2255 CON2.5
OUT6: CON2.6 D3.1 pad.34 Q3.2 | length 1627.7
  Bottom Layer w70: 1818,-1955 1764,-1955 Q3.2 1877,-1954 1878,-1955 ; 2510,-1955 2510,-2085 2533.33,-2108.33 D3.1
  Bottom Layer w100: 1878,-1955 2510,-1955 CON2.6
OUT7: CON2.7 D5.1 pad.33 Q5.2 | length 1019.8
  Bottom Layer w70: Q5.2 2330.25,-1655 2490,-1655 ; D5.1 2525,-1810 2490,-1775 2490,-1655 ; CON2.7 2490,-1655
OUT8: CON2.8 D7.1 pad.32 Q7.2 | length 1600.3
  Bottom Layer w70: Q7.2@1763,-1355 2480,-1355 ; D7.1 2511.67,-1511.67 2480,-1480 2480,-1355 ; CON2.8 2480,-1355
OUT9: CON2.9 D9.1 pad.31 Q9.2 | length 1034.3
  Bottom Layer w70: Q9.2 2331.5,-1055 2495,-1055 ; D9.1 2503.33,-1213.33 2495,-1205 2495,-1055 ; CON2.9 2495,-1055
OUT10: CON2.10 D10.1 pad.30 Q10.2 | length 1614.1
  Bottom Layer w70: Q10.2@1773,-745 1764,-754 2495,-754 2495,-905 2505,-915 D10.1 ; 2495,-755 CON2.10
OUT24V: CON4.1 D1.2 D2.2 D3.2 D4.2 D5.2 D6.2 D7.2 D8.2 D9.2 D10.2 pad.40 pad.41 pad.42 pad.43 pad.44 pad.45 pad.46 pad.47 pad.48 pad.49 | length 9375
  Bottom Layer w50: D2.2 3340,-3600 3350,-3610 ; D4.2 3336.67,-3301.67 3350,-3315 ; D6.2 3343.33,-3003.33 3350,-3010 ; D8.2 3345,-2705 3350,-2700 ; D1.2 3336.67,-2406.67 3350,-2420 ; D3.2 3346.67,-2108.33 3350,-2105 ; D5.2 3315,-1810 3320,-1805 ; D7.2 3336.67,-1511.67 3350,-1525 ; D9.2 2748.14,-1210 3350,-1210 ; D10.2 3320,-915 3350,-945 3350,-1007
  Bottom Layer w100: CON4.1 3265,-4050 3350,-3965 3350,-3610 3350,-3315 3350,-3010 3350,-2700 3350,-2420 3350,-2105 3350,-1525 3350,-1210 3350,-1007

## Polygon pours and split planes (outlines as drawn)
no net on Bottom Layer "Bottom Layer-No Net" (solid, pour order 16): 20,-5 20,-4745 3460,-4745 3460,-5
no net on Bottom Layer "Keep-Out Layer-No Net" (solid, pour order 8): 1385,-100 1385,-415 510,-415 425,-415 425,-100
no net on Bottom Layer "Keep-Out Layer-No Net" (solid, pour order 6): 2985,-100 2985,-415 2110,-415 2025,-415 2025,-100

## Keep-outs
Keep-Out Layer:
  the board outline again, w10

## Silkscreen, mask and mechanical layers (free items; w line width, h text height)
Top Overlay:
  lines w7: 519,-4197.26 529.3,-4197.26 529.3,-3611
  lines w10: 1664,-4177 1596,-4177 1596,-3976 1668,-3976
  text "OUTPUT" at 3084,-561 h60
  text "INPUT" at 42,-565 h60
  text "OUT FET V1.2" at 2102,-573 h200
  text "IN 10" at 554.89,-663 h200 r270
  text "OUT 10" at 2633.12,-782 h200
  text "IN 9" at 567,-994.81 h200 r270
  text "OUT 9" at 2667.89,-1082.48 h200
  text "IN 8" at 554.89,-1290.87 h200 r270
  text "OUT 8" at 2666.91,-1382.95 h200
  text "IN 7" at 566.61,-1593.78 h200 r270
  text "OUT 7" at 2672.77,-1683.43 h200
  text "IN 6" at 554.89,-1884.96 h200 r270
  text "OUT 6" at 2666.91,-1983.91 h200
  text "IN 5" at 567,-2184.15 h200 r270
  text "OUT 5" at 2669.06,-2284.39 h200
  text "IN 4" at 561.34,-2477.49 h200 r270
  text "OUT 4" at 2665.35,-2584.86 h200
  text "IN 3" at 567,-2779.41 h200 r270
  text "OUT 3" at 2670.23,-2885.34 h200
  text "IN 2" at 554.31,-3075.87 h200 r270
  text "OUT 2" at 2669.64,-3185.82 h200
  text "IN 1" at 554.31,-3386 h200 r270
  text "OUT 1" at 2682.73,-3486.3 h200
  text "GND" at 543,-3787 h200
  text "GND" at 2736.05,-3786.77 h200
  text "IN24V" at 538,-4079 h200
  text "24V" at 2762.61,-4081 h200
  text "INPUT" at 58,-4277 h60
  text "OUTPUT" at 3092,-4289 h60
  text "NPT Company" at 308,-4673 h60
  text "VO ANH TUAN" at 2032,-4673 h60
Bottom Solder:
  lines w30: 470,-245 830,-245 ; 715,-125 830,-245 ; 725,-350 830,-245 ; 2575,-265 2885,-265 ; 2770,-145 2875,-260 2795.77,-378.85
  lines w50: 1455.25,-2652.25 1763,-2652.25 ; 1459,-3252 1752,-3252
  lines w70: 1449.75,-1449.75 1705,-1449.75 ; 1450,-1680 1455,-1675 2120,-1675 2197.25,-1752.25 2330,-1752.25 ; 1450,-1095 2170,-1095 2228.5,-1153.5 2330,-1153.5 ; 1460,-2860 1485,-2885 2115,-2885 2179.75,-2949.75 2330,-2949.75 ; 1460,-2285 2150,-2285 2216,-2351 2330,-2351 ; 1489.75,-2047.75 1745,-2047.75 ; 1705,-848.5 1486.5,-848.5 1450,-885 1450,-3710 1495,-3755 3090,-3755 3095,-3750 ; 1763,-3156.5 3120,-3155 ; 1763,-2555.25 3109.75,-2555.25 3115,-2550 ; 1763,-1355 3112.25,-1352.75 ; 1763,-751.5 1769.5,-745 1779.5,-755 ; 1764,-1954 3099,-1954 3110,-1965 ; 1764,-755 3110,-755 ; 2330,-3745 2330,-3548.5 ; 2330,-3451.5 3118.5,-3451.5 ; 2330,-2852.75 3072.75,-2852.75 ; 2330,-2254 3109,-2254 ; 2330,-1655.25 2330.25,-1655 3110,-1655 ; 2330,-1056.5 3113.5,-1056.5 3120,-1050 ; 3090,-4045 3095,-4050 ; 3109,-1954 3110,-1955
  lines w80: 2828,-3753 2840,-3753 2840,-4287
  lines w90: 1486.5,-848.5 ccw(c1486.5,-882) 1453,-882 1453,-3700 ccw(c1503,-3700) 1503,-3750 3095,-3750
  lines w120: 1449,-874 1449,-3700 1549,-3800 3041,-3800 3091,-3750 ; 1463,-864 1458,-869 1458,-3695 1559,-3796 3049,-3796 3095,-3750
  text "INPUT" at 1250,-285 h200
  text "OUTPUT" at 2425,-286.37 h200
  text "GND" at 705,-3775 h200
  text "O_24V" at 2865,-4065 h200
  text "24V" at 700,-4075 h200